# EAGLE board CT_schematic (EAGLE 7.6.0)

Size 100 x 80 mm. Coordinates in mm from the lower left corner, seen from the top.
Outline: 0,0 100,0 100,80 0,80 0,0
Copper layers (1*16): Top 0.035mm / dielectric 1.5mm / Bottom 0.035mm
Design rules "default": minimum track width 10mil, minimum drill 24mil, track to track 8mil, track to pad 8mil, pad to pad 8mil, via to via 8mil, smd to smd 8mil, copper to edge 40mil, drill to drill 8mil, minimum pad ring 10mil, minimum via ring 8mil, stop-mask expansion 4mil, vias tented up to drill 0mil, thermal gap 10mil

## Footprints (pad centres in the part's own frame; a part is rotated, then mirrored left to right if it is on the bottom)
C0603 = smd 0.8 x 0.8: 1 -0.762,0; 2 0.762,0
C0402 = smd 0.5 x 0.5: 1 -0.508,0; 2 0.508,0
C0805 = smd 1.2 x 1.3: 1 -1.016,0; 2 1.016,0
C1206 = smd 1.3 x 1.6: 1 -1.524,0; 2 1.524,0
C1210 = smd 1.2 x 2.5: 1 -1.524,0; 2 1.524,0
EXV-9H = smd 3.505 x 1.676: 1 -2.857,0; 2 2.857,0
L0603 = smd 0.8 x 0.8: 1 -0.762,0; 2 0.762,0
PJ-037B_PACKAGE = drill 3.7 square: 1 12,0 | drill 3.2 square: 2 6,0
R0603 = smd 0.8 x 0.8: 1 -0.762,0; 2 0.762,0
LQFP100 = smd 0.3 x 1.2: 1 -6,-7.75; 2 -5.5,-7.75; 3 -5,-7.75; 4 -4.5,-7.75; 5 -4,-7.75; 6 -3.5,-7.75; 7 -3,-7.75; 8 -2.5,-7.75; 9 -2,-7.75; 10 -1.5,-7.75; 11 -1,-7.75; 12 -0.5,-7.75; 13 0,-7.75; 14 0.5,-7.75; 15 1,-7.75; 16 1.5,-7.75; 17 2,-7.75; 18 2.5,-7.75; 19 3,-7.75; 20 3.5,-7.75; 21 4,-7.75; 22 4.5,-7.75; 23 5,-7.75; 24 5.5,-7.75; 25 6,-7.75; 51 6,7.75; 52 5.5,7.75; 53 5,7.75; 54 4.5,7.75; 55 4,7.75; 56 3.5,7.75; 57 3,7.75; 58 2.5,7.75; 59 2,7.75; 60 1.5,7.75; 61 1,7.75; 62 0.5,7.75; 63 0,7.75; 64 -0.5,7.75; 65 -1,7.75; 66 -1.5,7.75; 67 -2,7.75; 68 -2.5,7.75; 69 -3,7.75; 70 -3.5,7.75; 71 -4,7.75; 72 -4.5,7.75; 73 -5,7.75; 74 -5.5,7.75; 75 -6,7.75 | smd 1.2 x 0.3: 26 7.75,-6; 27 7.75,-5.5; 28 7.75,-5; 29 7.75,-4.5; 30 7.75,-4; 31 7.75,-3.5; 32 7.75,-3; 33 7.75,-2.5; 34 7.75,-2; 35 7.75,-1.5; 36 7.75,-1; 37 7.75,-0.5; 38 7.75,0; 39 7.75,0.5; 40 7.75,1; 41 7.75,1.5; 42 7.75,2; 43 7.75,2.5; 44 7.75,3; 45 7.75,3.5; 46 7.75,4; 47 7.75,4.5; 48 7.75,5; 49 7.75,5.5; 50 7.75,6; 76 -7.75,6; 77 -7.75,5.5; 78 -7.75,5; 79 -7.75,4.5; 80 -7.75,4; 81 -7.75,3.5; 82 -7.75,3; 83 -7.75,2.5; 84 -7.75,2; 85 -7.75,1.5; 86 -7.75,1; 87 -7.75,0.5; 88 -7.75,0; 89 -7.75,-0.5; 90 -7.75,-1; 91 -7.75,-1.5; 92 -7.75,-2; 93 -7.75,-2.5; 94 -7.75,-3; 95 -7.75,-3.5; 96 -7.75,-4; 97 -7.75,-4.5; 98 -7.75,-5; 99 -7.75,-5.5; 100 -7.75,-6
SOIC-8 = smd 1.6 x 0.6: 1 -2.7,1.905 | smd 1.55 x 0.6: 2 -2.7,0.635; 3 -2.7,-0.635; 4 -2.7,-1.905; 5 2.7,-1.905; 6 2.7,-0.635; 7 2.7,0.635; 8 2.7,1.905
VFBGA-63 = smd 0.4 x 0.4: A1 -3.6,4.4; A2 -2.8,4.4; A9 2.8,4.4; A10 3.6,4.4; B1 -3.6,3.6; B9 2.8,3.6; B10 3.6,3.6; C3 -2,2.8; C4 -1.2,2.8; C5 -0.4,2.8; C6 0.4,2.8; C7 1.2,2.8; C8 2,2.8; D3 -2,2; D4 -1.2,2; D5 -0.4,2; D6 0.4,2; D7 1.2,2; D8 2,2; E3 -2,1.2; E4 -1.2,1.2; E5 -0.4,1.2; E6 0.4,1.2; E7 1.2,1.2; E8 2,1.2; F3 -2,0.4; F4 -1.2,0.4; F5 -0.4,0.4; F6 0.4,0.4; F7 1.2,0.4; F8 2,0.4; G3 -2,-0.4; G4 -1.2,-0.4; G5 -0.4,-0.4; G6 0.4,-0.4; G7 1.2,-0.4; G8 2,-0.4; H3 -2,-1.2; H4 -1.2,-1.2; H5 -0.4,-1.2; H6 0.4,-1.2; H7 1.2,-1.2; H8 2,-1.2; J3 -2,-2; J4 -1.2,-2; J5 -0.4,-2; J6 0.4,-2; J7 1.2,-2; J8 2,-2; K3 -2,-2.8; K4 -1.2,-2.8; K5 -0.4,-2.8; K6 0.4,-2.8; K7 1.2,-2.8; K8 2,-2.8; L1 -3.6,-3.6; L2 -2.8,-3.6; L9 2.8,-3.6; L10 3.6,-3.6; M1 -3.6,-4.4; M2 -2.8,-4.4; M9 2.8,-4.4; M10 3.6,-4.4
ABS07-32.768KHZ-7-T = smd 1.1 x 2.4: 1 -2.5,0; 2 0,0
ABLS-25.000MHZ-B2F-T = smd 5.6 x 2.8: 1 -3.81,0; 2 5.69,0
WSON-8 = smd 0.3 x 0.6: 1 -0.75,0; 2 0.05,0; 3 0.85,0; 4 1.65,0; 5 1.65,3.8; 6 0.85,3.8; 7 0.05,3.8; 8 -0.75,3.8 | smd 3 x 2.6: PAD 0.45,1.9
SON-6 = smd 0.55 x 0.3: 1 -0.355,0.5 | smd 0.52 x 0.3: 2 -0.37,0; 3 -0.37,-0.5; 4 0.37,-0.5; 5 0.37,0; 6 0.37,0.5
SW_4-1437565-2 = smd 1.4 x 2.1: 1 -2.23,4.55; 2 -2.23,-4.55; 3 2.23,4.55; 4 2.23,-4.55
LGM67K-G1J2-24-Z = smd 0.8 x 1.4: A -2,0; C 0,0
NC7SZ125M5X = smd 1.3 x 0.7: 1 -1.3,0.95; 2 -1.3,0; 3 -1.3,-0.95; 4 1.3,-0.95; 5 1.3,0.95

## Placement (x,y rotation side)
C1  1e-06  [C0603]  -52.07,62.23 0 top  (outside the outline)
C2  1e-07  [C0603]  -55.88,62.23 0 top  (outside the outline)
C3  1e-07  [C0603]  -59.69,62.23 0 top  (outside the outline)
C4  1e-07  [C0603]  -63.5,62.23 0 top  (outside the outline)
C5  1e-07  [C0603]  -67.31,62.23 0 top  (outside the outline)
C6  1e-07  [C0603]  -15.24,67.31 0 top  (outside the outline)
C7  1e-07  [C0603]  -19.05,67.31 0 top  (outside the outline)
C8  4.7e-06  [C0603]  -44.45,62.23 0 top  (outside the outline)
C9  1e-08  [C0603]  -22.86,67.31 0 top  (outside the outline)
C10  1e-06  [C0603]  -26.67,67.31 0 top  (outside the outline)
C11  1e-11  [C0402]  -53.34,67.31 0 top  (outside the outline)
C12  1e-11  [C0402]  -57.15,67.31 0 top  (outside the outline)
C13  1e-11  [C0402]  -60.96,67.31 0 top  (outside the outline)
C14  1e-11  [C0402]  -64.77,67.31 0 top  (outside the outline)
C15  1e-08  [C0402]  -68.58,67.31 0 top  (outside the outline)
C16  1e-08  [C0402]  -15.24,72.39 0 top  (outside the outline)
C17  1e-07  [C0402]  -19.05,72.39 0 top  (outside the outline)
C18  1e-07  [C0402]  -22.86,72.39 0 top  (outside the outline)
C19  1e-07  [C0402]  -26.67,72.39 0 top  (outside the outline)
C20  1e-07  [C0402]  -30.48,72.39 0 top  (outside the outline)
C21  2.2e-06  [C0603]  -48.26,62.23 0 top  (outside the outline)
C22  1e-06  [C0603]  -30.48,67.31 0 top  (outside the outline)
C23  1e-05  [C0805]  -46.99,49.53 0 top  (outside the outline)
C24  1e-08  [C0402]  -34.29,72.39 0 top  (outside the outline)
C25  1e-05  [C1206]  -35.56,49.53 0 top  (outside the outline)
C26  1e-05  [C1210]  -29.21,50.8 0 top  (outside the outline)
C27  1e-07  [C0402]  -38.1,72.39 0 top  (outside the outline)
C28  0.0001  [EXV-9H]  -55.88,34.29 0 top  (outside the outline)
C29  0.0001  [EXV-9H]  -17.78,43.18 0 top  (outside the outline)
C30  1e-08  [C0402]  -41.91,72.39 0 top  (outside the outline)
F1  240.0  [L0603]  -34.29,67.31 0 top  (outside the outline)
J1  PJ-037B  [PJ-037B_PACKAGE]  -48.26,7.62 0 top  (outside the outline)
R2  1000.0  [R0603]  -38.1,67.31 0 top  (outside the outline)
R4  4700.0  [R0603]  -41.91,67.31 0 top  (outside the outline)
R5  10000.0  [R0603]  -20.32,57.15 0 top  (outside the outline)
R6  10000.0  [R0603]  -25.4,57.15 0 top  (outside the outline)
R7  10000.0  [R0603]  -30.48,57.15 0 top  (outside the outline)
R8  10000.0  [R0603]  -35.56,57.15 0 top  (outside the outline)
R9  10000.0  [R0603]  -40.64,57.15 0 top  (outside the outline)
R10  10000.0  [R0603]  -45.72,57.15 0 top  (outside the outline)
R11  10000.0  [R0603]  -50.8,57.15 0 top  (outside the outline)
R12  10000.0  [R0603]  -55.88,57.15 0 top  (outside the outline)
R13  10000.0  [R0603]  -60.96,57.15 0 top  (outside the outline)
R14  10000.0  [R0603]  -66.04,57.15 0 top  (outside the outline)
R15  10000.0  [R0603]  -15.24,62.23 0 top  (outside the outline)
R16  10000.0  [R0603]  -20.32,62.23 0 top  (outside the outline)
R17  100000.0  [R0603]  -52.07,49.53 0 top  (outside the outline)
R18  36000.0  [R0603]  -25.4,62.23 0 top  (outside the outline)
R19  100000.0  [R0603]  -57.15,49.53 0 top  (outside the outline)
R20  100000.0  [R0603]  -62.23,49.53 0 top  (outside the outline)
R21  1500.0  [R0603]  -45.72,67.31 0 top  (outside the outline)
R22  1000.0  [R0603]  -49.53,67.31 0 top  (outside the outline)
R23  10000.0  [R0603]  -30.48,62.23 0 top  (outside the outline)
R24  10000.0  [R0603]  -35.56,62.23 0 top  (outside the outline)
R25  18000.0  [R0603]  -40.64,62.23 0 top  (outside the outline)
R26  470000.0  [R0603]  -67.31,49.53 0 top  (outside the outline)
R27  120000.0  [R0603]  -15.24,57.15 0 top  (outside the outline)
U1  STM32F303VDT6  [LQFP100]  -24.13,8.89 0 top  (outside the outline)
U2  AT25020B-SSHL-T  [SOIC-8]  -44.45,22.86 0 top  (outside the outline)
U3  AT25160B-SSHL-T  [SOIC-8]  -60.96,22.86 0 top  (outside the outline)
U4  mt29f4g08abbdah4  [VFBGA-63]  -54.61,6.35 0 top  (outside the outline)
U5  ABS07-32.768KHZ-7-T  [ABS07-32.768KHZ-7-T]  -59.69,43.18 0 top  (outside the outline)
U6  ABLS-25.000MHZ-B2F-T  [ABLS-25.000MHZ-B2F-T]  -36.83,43.18 0 top  (outside the outline)
U7  LP2951ACSDX/NOPB  [WSON-8]  -48.26,33.02 0 top  (outside the outline)
U8  LP3878SDX-ADJ/NOPB  [WSON-8]  -30.48,33.02 0 top  (outside the outline)
U9  TPS3895ADRYR  [SON-6]  -44.45,71.12 0 top  (outside the outline)
U10  4-1437565-2  [SW_4-1437565-2]  -27.94,24.13 0 top  (outside the outline)
U11  Q65110A2395  [LGM67K-G1J2-24-Z]  -17.78,50.8 0 top  (outside the outline)
U12  nc7sz125m5x  [NC7SZ125M5X]  -40.64,49.53 0 top  (outside the outline)

## Library data of the parts
C1-C30 F1 J1 R2 R4-R27 U1-U12 = circuit_tree

## Nets
CLK_CRYSTAL_U1_8: C11.1 U1.8 U5.1
CLK_CRYSTAL_U1_9: C12.1 U1.9 U5.2
CLK_CRYSTAL_U1_12: C13.1 U1.12 U6.1
CLK_CRYSTAL_U1_13: C14.1 U1.13 U6.2
GND: C1.2 C2.2 C3.2 C4.2 C5.2 C6.2 C7.2 C8.2 C9.2 C10.2 C11.2 C12.2 C13.2 C14.2 C15.2 C16.2 C17.2 C18.2 C19.2 C20.2 C21.2 C22.2 C23.2 C24.2 C25.2 C26.2 C27.2 C28.2 C29.2 C30.2 J1.2 R2.2 R5.2 R19.2 R22.2 R25.2 R27.2 U1.20 U1.27 U1.49 U1.74 U1.99 U2.4 U3.4 U4.C5 U4.F7 U4.K3 U4.K8 U7.3 U7.4 U7.PAD U8.3 U8.PAD U9.2 U11.C U12.1 U12.3
NET_U1_14: R4.1 U1.14 U12.4
NET_U1_22: C9.1 C10.1 F1.1 U1.21 U1.22
NET_U1_94: R5.1 U1.94
NET_U1_97: U11.A
NET_U1_98: U10.3 U10.4
NET_U2_3: R6.1 U2.3
NET_U2_7: R8.1 U2.7
NET_U3_3: R9.1 U3.3
NET_U3_7: R11.1 U3.7
NET_U4_C3: R16.1 U4.C3
NET_U4_C6: R13.1 U4.C6
NET_U4_C7: R14.1 U4.C7
NET_U4_C8: R12.1 U4.C8
NET_U4_D4: R15.1 U4.D4
NET_U7_5: R17.1 U7.5
NET_U7_7: R18.2 R19.1 U7.7
NET_U8_1: C24.1 U8.1
NET_U8_6: R21.2 R22.1 U8.6
NET_U8_8: R20.1 U8.8
NET_U9_1: R24.1 R25.1 U9.1
NET_U9_3: R26.2 R27.1 U9.3
NET_U9_4: R23.1 U9.4 U12.2
NET_U10_1: R2.1 U10.1 U10.2
PROC_SPI1_MISO: U1.31 U3.2
PROC_SPI1_MOSI: U1.32 U3.5
PROC_SPI1_NSS: R10.1 U1.29 U3.1
PROC_SPI1_SCK: U1.30 U3.6
PROC_SPI2_MISO: U1.53 U2.2
PROC_SPI2_MOSI: U1.54 U2.5
PROC_SPI2_NSS: R7.1 U1.51 U2.1
PROC_SPI2_SCK: U1.10 U2.6
VCC_S1_7V6: C22.1 C25.1 C28.1 C29.1 J1.1 R20.2 U7.8 U8.4
VCC_TIER1_1V8: C17.1 C18.1 C19.1 C20.1 C21.1 C23.1 C30.1 R12.2 R13.2 R14.2 R15.2 R16.2 R17.2 R18.1 U4.D3 U4.G4 U4.H8 U4.J6 U7.1 U12.5
VCC_TIER1_2V5: C1.1 C2.1 C3.1 C4.1 C5.1 C6.1 C7.1 C8.1 C15.1 C16.1 C26.1 C27.1 F1.2 R4.2 R6.2 R7.2 R8.2 R9.2 R10.2 R11.2 R21.1 R23.2 R24.2 R26.1 U1.6 U1.28 U1.50 U1.75 U1.100 U2.8 U3.8 U8.5 U9.6

## Tracks (layer width: path | path; a pad name or v marks a point on that pad's centre or on a via)
CLK_CRYSTAL_U1_8  (2 unrouted)
CLK_CRYSTAL_U1_9  (2 unrouted)
CLK_CRYSTAL_U1_12  (2 unrouted)
CLK_CRYSTAL_U1_13  (2 unrouted)
GND  (56 unrouted)
NET_U1_14  (2 unrouted)
NET_U1_22  (4 unrouted)
NET_U1_94  (1 unrouted)
NET_U1_98  (1 unrouted)
NET_U2_3  (1 unrouted)
NET_U2_7  (1 unrouted)
NET_U3_3  (1 unrouted)
NET_U3_7  (1 unrouted)
NET_U4_C3  (1 unrouted)
NET_U4_C6  (1 unrouted)
NET_U4_C7  (1 unrouted)
NET_U4_C8  (1 unrouted)
NET_U4_D4  (1 unrouted)
NET_U7_5  (1 unrouted)
NET_U7_7  (2 unrouted)
NET_U8_1  (1 unrouted)
NET_U8_6  (2 unrouted)
NET_U8_8  (1 unrouted)
NET_U9_1  (2 unrouted)
NET_U9_3  (2 unrouted)
NET_U9_4  (2 unrouted)
NET_U10_1  (2 unrouted)
PROC_SPI1_MISO  (1 unrouted)
PROC_SPI1_MOSI  (1 unrouted)
PROC_SPI1_NSS  (2 unrouted)
PROC_SPI1_SCK  (1 unrouted)
PROC_SPI2_MISO  (1 unrouted)
PROC_SPI2_MOSI  (1 unrouted)
PROC_SPI2_NSS  (2 unrouted)
PROC_SPI2_SCK  (1 unrouted)
VCC_S1_7V6  (7 unrouted)
VCC_TIER1_1V8  (19 unrouted)
VCC_TIER1_2V5  (32 unrouted)